# Altium PCB RGB LED.PcbDoc
Units mm, origin at the board's own origin, x right, y up, seen from the top; angles counter-clockwise.
Board outline 80 x 25 mm, 2 copper layers (Top Layer, Bottom Layer); 71 components, 81 nets, 247 pads, 87 vias.
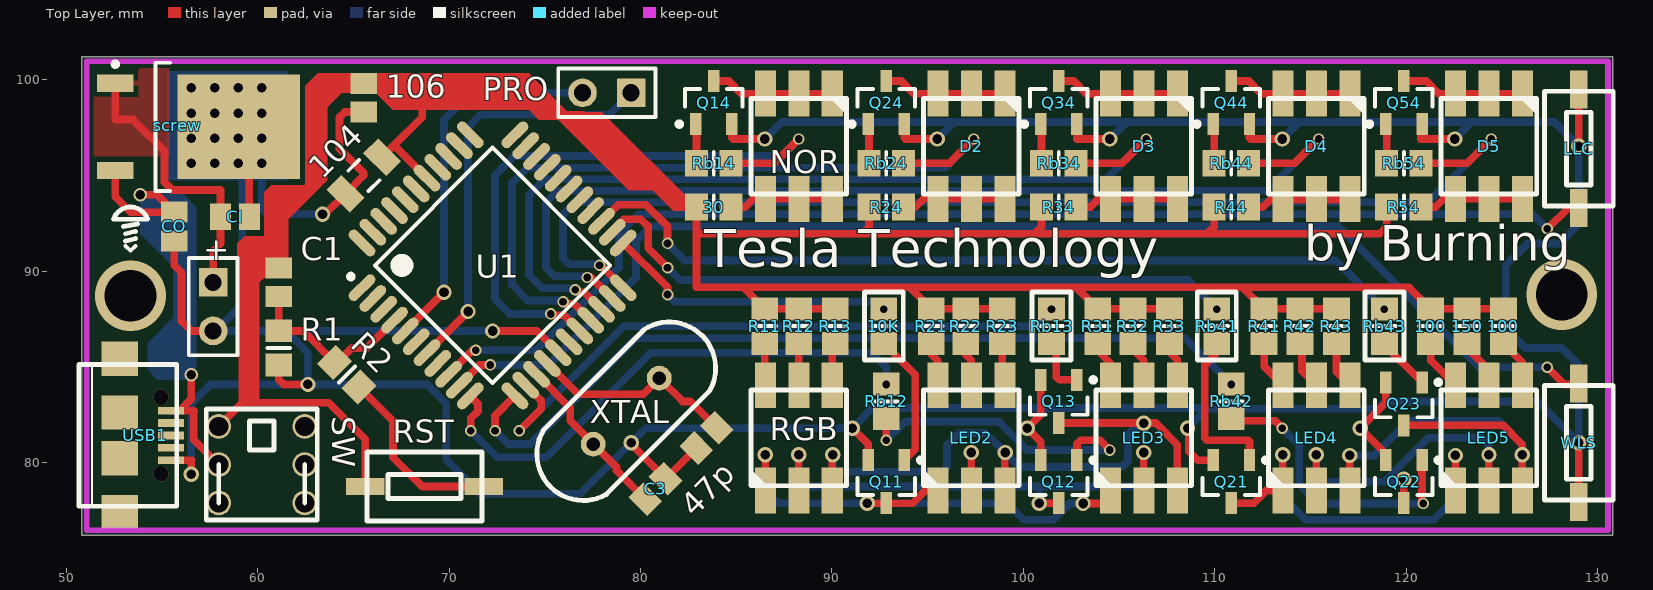
[diagram p0: Top Layer view]
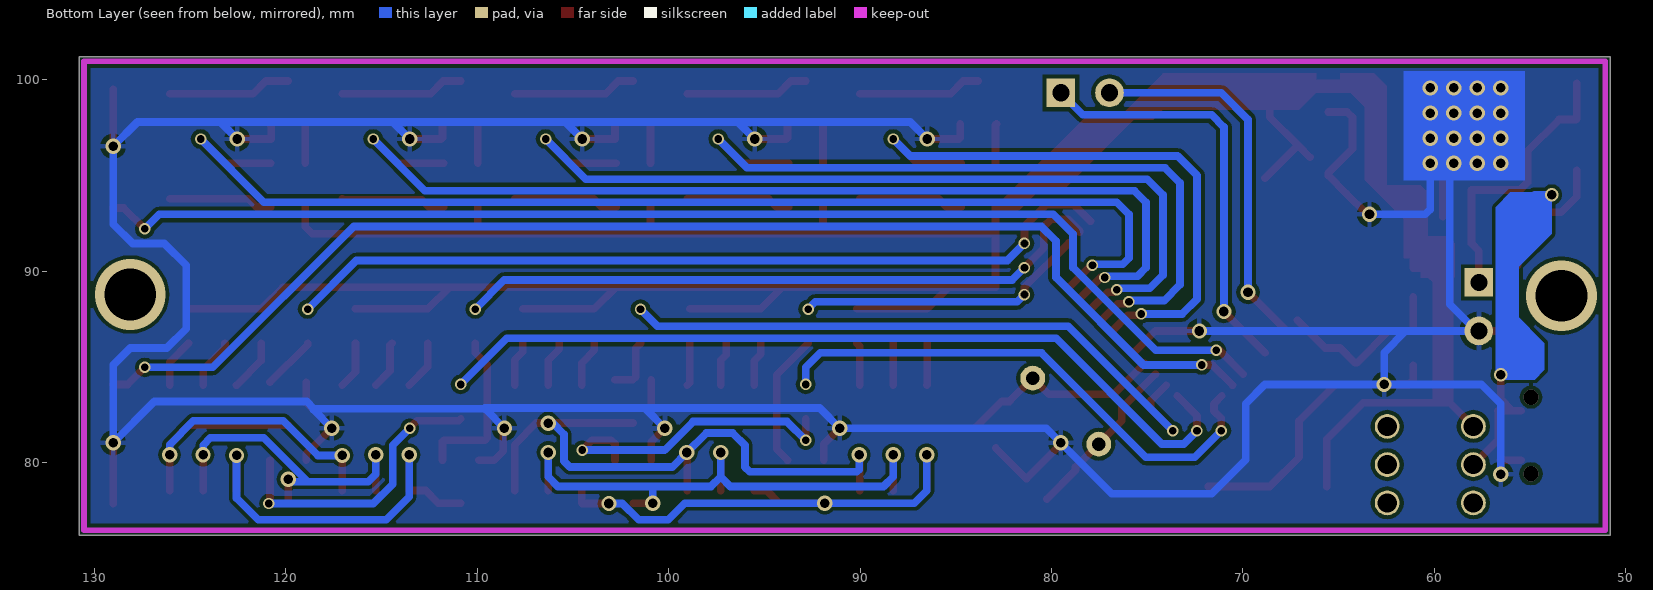
[diagram p1: Bottom Layer view, seen from below]

## Layer stack, top to bottom
Top Layer: signal copper 0.0356
Dielectric: dielectric 0.32, FR-4, Dk 4.8
Bottom Layer: signal copper 0.0356

## Board outline
50.8,76.2 130.8,76.2 130.8,101.2 50.8,101.2

## Design rules (kind name [scope] priority, off if disabled: settings)
Clearance [All] p1: gap=0.1
PolygonConnect [All] p1: connectstyle=Relief reliefconductorwidth=0.254 reliefentries=4 polygonreliefangle="90 Angle" airgapwidth=0.254
RoutingVias [All] p1: holewidth=0.6 width=1 viastyle="Through Hole" minholewidth=0.711 minwidth=1.27 maxholewidth=0.711 maxwidth=1.27
SolderMaskExpansion [All] p1: expansion=0.102
Width [All] p1: maxlimit=2 minlimit=0.1 preferedwidth=0.2
28 further rules are at their usual default settings.

## Classes and differential pairs
component class "RGB LED Beta1": C3 CI CO D2 D3 D4 D5 LED3 LED4 LED5 LLC Q11 Q12 Q13 Q14 Q21 Q22 Q23 Q24 Q34 Q44 Q54 R1 R2 R11 R12 R13 R21 R22 R23 R24 R31 R32 R33 R34 R41 R42 R43 R44 Rb12 Rb13 Rb14 Rb24 Rb34 Rb41 Rb42 Rb43 Rb44 Rb54 RST U1 WLS

## Components (designator, comment, footprint, x,y, rotation, side; value= is the part's Value field where it differs from the comment)
10K "Res2" 6-0805_N 92.71,87.122 r270 top (schematic designator Rb11)
30 "Res2" 6-0805_N 83.82,93.345 r0 top (schematic designator R14)
47p "Cap" C0805 83.439,81.28 r45 top (schematic designator C2)
100 "Res2" 6-0805_N 121.285,87.122 r270 top (schematic designator R51)
100 "Res2" 6-0805_N 125.095,87.122 r270 top (schematic designator R53)
104 "Cap" C1206 65.532,94.996 r225 top (schematic designator C5)
106 "Cap Pol1" C0805 65.532,99.06 r270 top (schematic designator C4)
150 "Res2" 6-0805_N 123.19,87.122 r270 top (schematic designator R52)
+ "Header" HDR1X2 57.658,89.408 r270 top (schematic designator POW)
C1 "Cap Pol1" C0805 61.087,89.408 r270 top
C3 "Cap" C0805 80.772,78.613 r225 top
CI "Cap Pol1" C0805 58.801,92.837 r0 top
CO "Cap Pol1" C0805 55.626,92.329 r270 top
D2 "LED0" "LED 5050 NoneRGB" 97.282,96.52 r90 top
D3 "LED0" "LED 5050 NoneRGB" 106.299,96.52 r90 top
D4 "LED0" "LED 5050 NoneRGB" 115.316,96.52 r90 top
D5 "LED0" "LED 5050 NoneRGB" 124.333,96.52 r90 top
LED2 "RGB LED" "LED 5050" 97.282,81.28 r270 top
LED3 "RGB LED" "LED 5050" 106.299,81.28 r270 top
LED4 "RGB LED" "LED 5050" 115.316,81.28 r270 top
LED5 "RGB LED" "LED 5050" 124.333,81.28 r270 top
LLC "SW-PB" SW_A 129.032,96.393 r90 top
NOR "LED0" "LED 5050 NoneRGB" 88.265,96.52 r90 top (schematic designator D1)
PRO "Header" HDR1X2 79.502,99.314 r180 top (schematic designator P2)
Q11 "s8050" SOT-23_A_N 92.837,78.994 r270 top
Q12 "s8050" SOT-23_A_N 101.854,78.994 r270 top
Q13 "s8050" SOT-23_A_N 101.854,83.185 r270 top
Q14 "s8050" SOT-23_A_N 83.82,98.806 r90 top
Q21 "s8050" SOT-23_A_N 110.871,78.994 r270 top
Q22 "s8050" SOT-23_A_N 119.888,78.994 r270 top
Q23 "s8050" SOT-23_A_N 119.888,83.058 r270 top
Q24 "s8050" SOT-23_A_N 92.837,98.806 r90 top
Q34 "s8050" SOT-23_A_N 101.854,98.806 r90 top
Q44 "s8050" SOT-23_A_N 110.871,98.806 r90 top
Q54 "s8050" SOT-23_A_N 119.888,98.806 r90 top
R1 "Res2" 6-0805_N 61.087,85.979 r270 top
R2 "Res2" 6-0805_N 64.643,84.582 r315 top
R11 "Res2" 6-0805_N 86.487,87.122 r270 top
R12 "Res2" 6-0805_N 88.265,87.122 r270 top
R13 "Res2" 6-0805_N 90.17,87.122 r270 top
R21 "Res2" 6-0805_N 95.186,87.122 r270 top
R22 "Res2" 6-0805_N 96.996,87.122 r270 top
R23 "Res2" 6-0805_N 98.901,87.122 r270 top
R24 "Res2" 6-0805_N 92.837,93.345 r0 top
R31 "Res2" 6-0805_N 103.886,87.122 r270 top
R32 "Res2" 6-0805_N 105.727,87.122 r270 top
R33 "Res2" 6-0805_N 107.632,87.122 r270 top
R34 "Res2" 6-0805_N 101.854,93.345 r0 top
R41 "Res2" 6-0805_N 112.585,87.122 r270 top
R42 "Res2" 6-0805_N 114.459,87.122 r270 top
R43 "Res2" 6-0805_N 116.364,87.122 r270 top
R44 "Res2" 6-0805_N 110.871,93.345 r0 top
R54 "Res2" 6-0805_N 119.888,93.345 r0 top
Rb12 "Res2" 6-0805_N 92.837,83.185 r270 top
Rb13 "Res2" 6-0805_N 101.473,87.122 r270 top
Rb14 "Res2" 6-0805_N 83.82,95.631 r180 top
Rb24 "Res2" 6-0805_N 92.837,95.631 r180 top
Rb34 "Res2" 6-0805_N 101.854,95.631 r180 top
Rb41 "Res2" 6-0805_N 110.109,87.122 r270 top
Rb42 "Res2" 6-0805_N 110.871,83.185 r270 top
Rb43 "Res2" 6-0805_N 118.872,87.122 r270 top
Rb44 "Res2" 6-0805_N 110.871,95.631 r180 top
Rb54 "Res2" 6-0805_N 119.888,95.631 r180 top
RGB "RGB LED" "LED 5050" 88.265,81.28 r270 top (schematic designator LED1)
RST "SW-PB" SW_A 68.707,78.74 r180 top
screw "78M05" TO_252 56.896,97.536 r0 top (schematic designator Q1)
SW "SWPB_A" SW_B 60.198,79.883 r0 top (schematic designator PS1)
U1 "89C5x/ 90C5x" TQFP44_N 72.263,90.297 r45 top
USB1 "Header 5" Micro_USB_B 56.134,81.407 r270 top
WLS "SW-PB" SW_A 129.032,81.026 r270 top
XTAL "XTAL" XTAL 79.248,82.677 r225 top (schematic designator Y1)

## Footprints (in the part's own frame and the unit in brackets; to place one, negate y for a bottom-side part, rotate by r counter-clockwise, add the part's x,y. Pads: shape width x height; smd on the part's side, far side on the other; paste and mask are expansions set on the pad)
6-0805_N [mm] "Chip Resistor, Body 2.0x1.2mm, IPC Medium Density"
  rect 1.2x1.4 smd: 1(-0.9,0) 2(0.9,0)
  silkscreen extent 0,-0.6 0,0.6, body extent -1.07,-0.7 1.07,0.7, height 0.7
C0805 [mm] "Chip Capacitor, Body 2.0x1.3mm, IPC High Density"
  rect 1.1x1.4 smd: 1(-0.75,0) 2(0.75,0)
  body extent -1.1,-0.72 1.1,0.72, height 1.4
C1206 [mm] "Chip Capacitor, Body 3.2x1.6mm, IPC High Density"
  rect 1.1x1.7 smd: 1(-1.35,0) 2(1.35,0)
  silkscreen extent -0.4,-0.75 0.4,0.75, body extent -1.7,-0.9 1.7,0.9, height 1.3
HDR1X2 [mm] "Connector; Header; 2 Position"
  rect 1.5x1.5 hole 0.9: 1(0,0)
  round 1.5 hole 0.9: 2(2.54,0)
  silkscreen extent -1.27,-1.27 3.81,1.27
"LED 5050" [mm]
  rect 2.4x1.1 smd mask+0.1: 1(-2.75,-1.75) 2(-2.75,0) 3(-2.75,1.75) 4(2.75,1.75) 5(2.75,0) 6(2.75,-1.75)
  silkscreen extent -2.5,-2.5 2.5,2.5
"LED 5050 NoneRGB" [mm]
  rect 2.4x1.1 smd mask+0.1: 1(-2.75,-1.75) 1(-2.75,0) 1(-2.75,1.75) 2(2.75,-1.75) 2(2.75,0) 2(2.75,1.75)
  silkscreen extent -2.5,-2.5 2.5,2.5
Micro_USB_B [mm] "Micro_USB_B"
  rect 1.8x1.9 smd mask+0.1: 0(-4,-3.35) 0(-1.2,-3.35) 0(1.2,-3.35) 0(4,-3.35)
  rect 0.4x1.35 smd mask+0.07: 1(-1.3,-0.675) 2(-0.65,-0.675) 3(0,-0.675) 4(0.65,-0.675) 5(1.3,-0.675)
  silkscreen extent -3.7,-5.5 3.7,-0.38
SOT-23_A_N [mm]
  rect 1.15x0.6 smd: 1(-1.125,-0.95) 2(-1.125,0.95) 3(1.125,0)
  silkscreen extent -1.25,-1.5 0.7,1.93, body extent -0.7,-1.5 0.7,1.5, height 1.1
SW_A [mm]
  rect 2x0.9 smd mask+0.1: 1(-3.1,0) 2(3.1,0)
  silkscreen extent -3,-1.8 3,1.8
SW_B [mm]
  round 1.3 hole 1 mask+0.1: 1(-2.25,2) 2(-2.25,0) 3(-2.25,-2) 4(2.25,-2) 5(2.25,0) 6(2.25,2)
  silkscreen extent -2.9,-2.9 2.9,2.9
TO_252 [mm]
  rect 1.9x0.9 smd: 1(-4.35,2.28) 3(-4.35,-2.28)
  rect 6.4x5.45 smd: 2(2.1,0)
  silkscreen extent -4.47,-3.35 -1.5,3.4, body extent -2.25,-3.35 3.97,3.35, height 2.38
TQFP44_N [mm] "Thin QFP, 44-Leads, Body 10x10mm, Pitch 0.8mm, IPC Medium Density"
  oval 1.75x0.55 smd: 1(-5.65,4) 2(-5.65,3.2) 3(-5.65,2.4) 4(-5.65,1.6) 5(-5.65,0.8) 6(-5.65,0) 7(-5.65,-0.8) 8(-5.65,-1.6) 9(-5.65,-2.4) 10(-5.65,-3.2) 11(-5.65,-4) 23(5.65,-4) 24(5.65,-3.2) 25(5.65,-2.4) 26(5.65,-1.6) 27(5.65,-0.8) 28(5.65,0) 29(5.65,0.8) 30(5.65,1.6) 31(5.65,2.4) 32(5.65,3.2) 33(5.65,4)
  oval 0.55x1.75 smd: 12(-4,-5.65) 13(-3.2,-5.65) 14(-2.4,-5.65) 15(-1.6,-5.65) 16(-0.8,-5.65) 17(0,-5.65) 18(0.8,-5.65) 19(1.6,-5.65) 20(2.4,-5.65) 21(3.2,-5.65) 22(4,-5.65) 34(4,5.65) 35(3.2,5.65) 36(2.4,5.65) 37(1.6,5.65) 38(0.8,5.65) 39(0,5.65) 40(-0.8,5.65) 41(-1.6,5.65) 42(-2.4,5.65) 43(-3.2,5.65) 44(-4,5.65)
  silkscreen extent -5.77,-4.35 4.35,4.95, body extent -5,-5 5,5, height 1.6
XTAL [mm]
  round 1.3 hole 0.7 mask+0.1: 1(-2.44,0) 2(2.44,0)
  silkscreen extent -5.6,-2.36 5.6,2.34

## Part data
10K 30 100 100 150 R1 R2 R11 R12 R13 R21 R22 R23 R24 R31 R32 R33 R34 R41 R42 R43 R44 R54 Rb12 Rb13 Rb14 Rb24 Rb34 Rb41 Rb42 Rb43 Rb44 Rb54: "Resistor"
47p 104 C3: "Capacitor"
106 C1 CI CO: "Polarized Capacitor (Radial)"
+ PRO: library part "Header 2", "Header, 2-Pin"
D2 D3 D4 D5 NOR: "Typical INFRARED GaAs LED"
LLC RST WLS: "Switch"
Q11 Q12 Q13 Q14 Q21 Q22 Q23 Q24 Q34 Q44 Q54: library part 2N3904, "NPN General Purpose Amplifier"
screw: library part 78XX
SW: library part SW-SPST, "Single-Pole, Single-Throw Switch"
USB1: "Header, 5-Pin"
XTAL: "Crystal Oscillator"

## Via types
v1: diameter 0.8, hole 0.5, Top Layer to Bottom Layer, 51 vias
v2: diameter 0.6, hole 0.4, Top Layer to Bottom Layer, 30 vias
v3: diameter 0.7, hole 0.5, Top Layer to Bottom Layer, 2 vias
v4: diameter 0.8, hole 0.8, Top Layer to Bottom Layer, 2 vias
v5: diameter 3.7, hole 2.7, Top Layer to Bottom Layer, 2 vias

## Nets (pads, with @x,y where several pads share a name; then routed paths per layer and width w, separated by ;. In a path a pad name is that pad's centre, name@x,y a point inside that pad or via, vN(x,y) a via of type N, cw(c..) or ccw(c..) an arc to the next point about the centre after c; other vN are vias at no path point)
GND: 47p.1 104.2 106.2 +.2 C3.1 CI.2 CO.2 LLC.2 Q11.1 Q12.1 Q13.1 Q14.1 Q21.1 Q22.1 Q23.1 Q24.1 Q34.1 Q44.1 Q54.1 R1.2 screw.2 U1.16 USB1.5 WLS.2 | length 255.5
  Top Layer w0.4: USB1.5 56.545,80.107 56.515,80.077 v1(56.515,79.375) ; CO.2 55.626,90.297 56.007,89.916 56.007,87.376 56.515,86.868 +.2 ; screw.2 59.551,96.981 CI.2 ; R1.2 61.087,84.328 61.341,84.074 v1(62.611,84.074) ; v1(63.373,92.964) 63.5,92.964 104.2 65.532,94.996 65.532,95.123 64.262,96.393 64.262,98.044 64.528,98.31 106.2 ; v1(72.263,86.868) 74.561,86.868 U1.16 ; v1(79.502,81.026) 79.502,80.944 C3.1 47p.1 ; Q14.1 84.77,96.967 84.836,96.901 v1(86.487,96.901) ; v1(91.059,81.788) 91.887,80.96 Q11.1 ; Q24.1 93.787,96.967 93.853,96.901 v1(95.504,96.901) ; Q12.1 100.904,81.087 v1(100.203,81.788) 100.904,82.489 Q13.1 ; Q34.1 102.804,96.901 v1(104.521,96.901) ; v1(108.585,81.788) 108.649,81.724 108.649,80.581 109.111,80.119 Q21.1 ; Q44.1 111.821,96.967 111.887,96.901 v1(113.538,96.901) ; Q22.1 118.938,80.452 v1(117.602,81.788) 118.938,83.124 Q23.1 ; Q54.1 120.777,97.62 120.777,96.901 v1(122.555,96.901) ; WLS.2@129.032,77.851 v1(129.032,81.026) ; v1(129.032,96.52) LLC.2
  Bottom Layer w0.4: v1(56.515,79.375) 56.515,83.058 57.531,84.074 v1(62.611,84.074) ; +.2 +.2@57.785,86.868 ; v1(58.97,95.631) 59.182,95.419 59.182,88.265 +.2@57.785,86.868 ; v1(60.198,95.631) 60.198,93.218 60.452,92.964 v1(63.373,92.964) ; v1(72.263,86.868) 61.468,86.868 ; v1(86.487,96.901) 87.376,97.79 96.393,97.79 ; v1(95.504,96.901) 96.393,97.79 ; v1(100.203,81.788) 101.257,82.842 ; v1(104.521,96.901) 105.41,97.79 ; v1(108.585,81.788) 109.563,82.766 ; v1(113.538,96.901) 114.427,97.79 ; v1(117.602,81.788) 118.58,82.766 118.542,82.804 ; v1(122.555,96.901) 123.444,97.79 ; +.2@57.785,86.868 61.468,86.868 ; 61.468,86.868 62.611,85.725 v1(62.611,84.074) ; v1(62.611,84.074) 68.834,84.074 69.85,83.058 69.85,80.137 71.628,78.359 76.835,78.359 v1(79.502,81.026) 80.264,81.788 v1(91.059,81.788) 92.113,82.842 101.257,82.842 ; 96.393,97.79 105.41,97.79 ; 101.257,82.842 109.601,82.842 109.601,82.804 118.542,82.804 ; 105.41,97.79 114.427,97.79 ; 114.427,97.79 123.444,97.79 ; 118.542,82.804 118.923,83.185 126.873,83.185 v1(129.032,81.026) 129.032,85.09 128.143,85.979 126.238,85.979 125.222,86.995 125.222,90.297 126.365,91.44 128.016,91.44 129.032,92.456 v1(129.032,96.52) 127.762,97.79 123.444,97.79
  other v1: 56.515,95.631 57.743,95.631 56.515,96.943 57.743,96.943 58.97,96.943 60.198,96.943 56.515,98.256 57.743,98.256 58.97,98.256 60.198,98.256 56.515,99.568 57.743,99.568 58.97,99.568 60.198,99.568
INPUT: CO.1 screw.3 SW.2 USB1.1 | length 24.6
  Top Layer w0.4: screw.3 52.546,93.885 53.352,93.079 CO.1 54.725,93.98 v3(53.848,93.98) ; USB1.1 USB1.1@55.91,82.707 ; v3(56.515,84.582) 56.515,83.312 USB1.1@55.91,82.707 ; 56.637,82.682 56.612,82.707 USB1.1@55.91,82.707 ; 56.642,82.677 56.642,81.189 SW.2
  Top Layer w0.45: 56.637,82.682 56.642,82.677
  Bottom Layer w0.4: v3(53.848,93.98) 54.737,93.98 55.753,92.964 55.753,86.487 56.515,85.725 v3(56.515,84.582)
NetCI_1: +.1 CI.1 screw.1 | length 14.8
  Top Layer w0.4: screw.1 52.546,97.949 52.578,97.917 53.467,97.917 55.118,96.266 55.118,94.627 55.511,94.234 58.039,94.234 58.039,91.44 57.658,91.059 +.1
NetD1_1: 30.2 NOR.1 | length 5.5
  Top Layer w0.4: 30.2 85.471,93.345 85.896,93.77 86.515,93.77 88.265,93.77 NOR.1@90.015,93.77
NetD1_2: NOR.2 Q14.3 | length 6.5
  Top Layer w0.4: Q14.3 84.6,99.931 85.261,99.27 86.515,99.27 88.265,99.27 NOR.2@90.015,99.27
NetD2_1: D2.1 R24.2 | length 5.5
  Top Layer w0.4: R24.2 94.361,93.345 94.786,93.77 95.532,93.77 97.282,93.77 D2.1@99.032,93.77
NetD2_2: D2.2 Q24.3 | length 6.5
  Top Layer w0.4: Q24.3 93.617,99.931 94.278,99.27 D2.2@99.032,99.27
NetD3_1: D3.1 R34.2 | length 5.5
  Top Layer w0.4: R34.2 103.505,93.345 103.93,93.77 104.549,93.77 106.299,93.77 D3.1@108.049,93.77
NetD3_2: D3.2 Q34.3 | length 6.5
  Top Layer w0.4: Q34.3 102.634,99.931 103.295,99.27 104.549,99.27 106.299,99.27 D3.2@108.049,99.27
NetD4_1: D4.1 R44.2 | length 5.5
  Top Layer w0.4: R44.2 112.522,93.345 112.903,93.726 117.022,93.726 D4.1@117.066,93.77
NetD4_2: D4.2 Q44.3 | length 6.5
  Top Layer w0.4: Q44.3 111.778,99.931 112.439,99.27 113.566,99.27 115.316,99.27 D4.2@117.066,99.27
NetD5_1: D5.1 R54.2 | length 5.5
  Top Layer w0.4: R54.2 121.539,93.345 121.964,93.77 122.583,93.77 124.333,93.77 D5.1@126.083,93.77
NetD5_2: D5.2 Q54.3 | length 6.5
  Top Layer w0.4: Q54.3 121.049,99.931 121.71,99.27 122.583,99.27 124.333,99.27 D5.2@126.083,99.27
NetLED1_1: R11.2 RGB.1 | length 2.2
  Top Layer w0.4: R11.2 86.487,84.058 RGB.1
NetLED1_2: R12.2 RGB.2 | length 2.2
  Top Layer w0.4: RGB.2 R12.2
NetLED1_3: R13.2 RGB.3 | length 2.3
  Top Layer w0.4: RGB.3 90.015,86.067 R13.2
NetLED1_4: LED2.4 LED3.4 Q13.3 RGB.4 | length 34
  Top Layer w0.4: RGB.4 90.015,80.363 v1(90.043,80.391) ; LED2.4 99.032,80.49 v1(99.06,80.518) ; Q13.3 106.916,82.06 108.049,80.927 LED3.4
  Bottom Layer w0.4: v1(90.043,80.391) 90.043,79.629 90.17,79.502 95.758,79.502 96.012,79.756 96.012,80.899 96.647,81.534 98.044,81.534 v1(99.06,80.518) 99.822,79.756 105.156,79.756 105.474,80.073 105.474,81.471 106.045,82.042 v1(106.299,82.042)
NetLED1_5: LED2.5 LED3.5 Q12.3 RGB.5 | length 30.3
  Top Layer w0.4: RGB.5 v1(88.265,80.391) ; LED2.5 v1(97.282,80.518) ; v1(100.838,77.869) Q12.3 ; LED3.5 v1(106.299,80.518)
  Bottom Layer w0.4: v1(88.265,80.391) 88.265,79.248 88.773,78.74 96.774,78.74 97.282,79.248 ; v1(97.282,80.518) 97.282,79.248 ; v1(100.838,77.869) 100.838,78.74 ; v1(106.299,80.518) 106.299,79.248 105.791,78.74 100.838,78.74 ; 97.282,79.248 97.79,78.74 100.838,78.74
NetLED1_6: LED2.6 LED3.6 Q11.3 RGB.6 | length 27.4
  Top Layer w0.4: RGB.6 v1(86.515,80.391) ; v1(91.839,77.869) Q11.3 94.216,77.869 94.877,78.53 LED2.6 ; v1(103.124,77.851) 104.521,77.851 104.549,77.879 LED3.6
  Bottom Layer w0.4: v1(86.515,80.391) 86.515,78.514 87.16,77.869 v1(91.839,77.869) 99.169,77.869 100.034,77.004 101.573,77.004 102.42,77.851 v1(103.124,77.851)
NetLED2_1: LED2.1 R21.2 | length 2.3
  Top Layer w0.4: R21.2 95.187,85.661 95.532,85.316 LED2.1
NetLED2_2: LED2.2 R22.2 | length 2.3
  Top Layer w0.4: R22.2 96.996,85.63 97.282,85.344 LED2.2
NetLED2_3: LED2.3 R23.2 | length 2.2
  Top Layer w0.4: R23.2 98.901,84.161 LED2.3
NetLED3_1: LED3.1 R31.2 | length 2.5
  Top Layer w0.4: R31.2 103.886,85.852 104.549,85.189 LED3.1
NetLED3_2: LED3.2 R32.2 | length 2.4
  Top Layer w0.4: R32.2 105.728,85.915 106.299,85.344 LED3.2
NetLED3_3: LED3.3 R33.2 | length 2.4
  Top Layer w0.4: R33.2 107.633,85.788 108.049,85.372 LED3.3
NetLED4_1: LED4.1 R41.2 | length 2.6
  Top Layer w0.4: R41.2 112.586,85.01 LED4.1
NetLED4_2: LED4.2 R42.2 | length 2.5
  Top Layer w0.4: R42.2 114.566,86.115 114.566,84.78 LED4.2
NetLED4_3: LED4.3 R43.2 | length 2.5
  Top Layer w0.4: R43.2 116.364,84.732 LED4.3
NetLED4_4: LED4.4 LED5.4 Q23.3 | length 21.7
  Top Layer w0.4: LED4.4 v1(117.066,80.363) ; Q23.3 125.077,81.933 126.083,80.927 v1(126.083,80.391) LED5.4
  Bottom Layer w0.4: v1(117.066,80.363) 118.336,80.363 120.142,82.169 124.841,82.169 126.083,80.927 v1(126.083,80.391)
NetLED4_5: LED4.5 LED5.5 Q22.3 | length 17.8
  Top Layer w0.4: LED4.5 v1(115.316,80.391) ; Q22.3 v1(119.888,79.121) ; LED5.5 v1(124.333,80.391)
  Bottom Layer w0.4: v1(115.316,80.391) 115.316,79.375 115.697,78.994 118.872,78.994 ; v1(119.888,79.121) 119.761,78.994 118.872,78.994 ; v1(124.333,80.391) 124.333,80.899 123.952,81.28 121.158,81.28 118.872,78.994
NetLED4_6: LED4.6 LED5.6 Q21.3 | length 21.1
  Top Layer w0.4: Q21.3 112.032,77.869 112.693,78.53 LED4.6 v1(113.566,80.391) ; LED5.6 v1(122.583,80.363)
  Bottom Layer w0.4: v1(113.566,80.391) 113.566,78.204 114.766,77.004 121.454,77.004 122.583,78.133 v1(122.583,80.363)
NetLED5_1: 100.2@121.285,86.222 LED5.1 | length 2.7
  Top Layer w0.4: 100.2@121.285,86.222 121.285,85.328 LED5.1
NetLED5_2: 150.2 LED5.2 | length 2.7
  Top Layer w0.4: 150.2 123.19,85.979 124.333,84.836 LED5.2
NetLED5_3: 100.2@125.095,86.222 LED5.3 | length 2.6
  Top Layer w0.4: 100.2@125.095,86.222 126.083,85.234 LED5.3
NetQ11_2: 10K.2 Q11.2 | length 7
  Top Layer w0.4: 10K.2 94.35,84.582 94.35,80.682 Q11.2
NetQ12_2: Q12.2 Rb12.2 | length 16.7
  Top Layer w0.4: v2(92.837,81.153) Rb12.2 ; Q12.2 102.804,80.96 102.997,81.153 104.013,81.153 v2(104.521,80.645)
  Bottom Layer w0.4: v2(92.837,81.153) 93.818,82.134 98.726,82.134 100.215,80.645 v2(104.521,80.645)
NetQ13_2: Q13.2 Rb13.2 | length 3
  Top Layer w0.4: Rb13.2 101.727,85.968 101.727,84.455 101.872,84.31 Q13.2
NetQ14_2: Q14.2 Rb14.2 | length 2.1
  Top Layer w0.4: Q14.2 82.92,97.631 Rb14.2
NetQ21_2: Q21.2 Rb41.2 | length 8.6
  Top Layer w0.4: Rb41.2 110.109,85.725 109.474,85.09 109.474,81.28 109.601,81.153 111.76,81.153 111.821,81.092 Q21.2
NetQ22_2: Q22.2 Rb42.2 | length 15.4
  Top Layer w0.4: Rb42.2 110.987,82.169 113.157,82.169 v2(113.538,81.788) ; Q22.2 120.838,77.917 v2(120.904,77.851)
  Bottom Layer w0.4: v2(113.538,81.788) 114.427,80.899 114.427,78.867 115.443,77.851 v2(120.904,77.851)
NetQ23_2: Q23.2 Rb43.2 | length 2.9
  Top Layer w0.4: Rb43.2 118.872,86.149 Q23.2
NetQ24_2: Q24.2 Rb24.2 | length 2.1
  Top Layer w0.4: Q24.2 91.937,97.631 Rb24.2
NetQ34_2: Q34.2 Rb34.2 | length 2.1
  Top Layer w0.4: Q34.2 100.954,97.631 Rb34.2
NetQ44_2: Q44.2 Rb44.2 | length 2.1
  Top Layer w0.4: Q44.2 109.971,97.631 Rb44.2
NetQ54_2: Q54.2 Rb54.2 | length 2.1
  Top Layer w0.4: Q54.2 118.988,97.631 Rb54.2
NetR2_2: R2.2 RST.1 | length 9.8
  Top Layer w0.4: R2.2 67.056,82.169 67.056,80.264 68.58,78.74 RST.1
P0.0: U1.37
P0.1: U1.36
P0.2: U1.35
P0.3: U1.34
P0.4: U1.33
P0.5: U1.32
P0.6: U1.31
P0.7: U1.30
P1.0: U1.40
P1.1: U1.41
P1.2: U1.42
P1.3: U1.43
P1.4: U1.44
P1.5: U1.1
P1.6: U1.2
P1.7: U1.3
P2.0: Rb14.1 U1.18 | length 32.3
  Top Layer w0.4: v2(75.311,87.757) 75.376,87.692 75.999,87.692 U1.18 ; Rb14.1 86.995,95.631 v2(88.265,96.901)
  Bottom Layer w0.4: v2(75.311,87.757) 73.152,87.757 72.39,88.519 72.39,94.996 73.406,96.012 87.376,96.012 v2(88.265,96.901)
P2.1: Rb24.1 U1.19 | length 39.5
  Top Layer w0.4: v2(75.946,88.392) 76.046,88.292 76.531,88.292 U1.19 ; Rb24.1 96.139,95.631 v2(97.409,96.901)
  Bottom Layer w0.4: v2(75.946,88.392) 75.881,88.457 74.103,88.457 73.279,89.281 73.279,94.615 74.063,95.399 95.907,95.399 v2(97.409,96.901)
P2.2: Rb34.1 U1.20 | length 46.4
  Top Layer w0.4: v2(76.581,89.027) 76.716,88.892 77.062,88.892 U1.20 ; Rb34.1 105.156,95.631 v2(106.426,96.901)
  Bottom Layer w0.4: v2(76.581,89.027) 76.516,89.092 74.865,89.092 74.168,89.789 74.168,93.98 74.987,94.799 104.324,94.799 v2(106.426,96.901)
P2.3: Rb44.1 U1.21 | length 53.5
  Top Layer w0.4: v2(77.216,89.662) 77.423,89.662 U1.21 ; Rb44.1 114.173,95.631 v2(115.443,96.901)
  Bottom Layer w0.4: v2(77.216,89.662) 77.151,89.727 75.5,89.727 75.057,90.17 75.057,93.599 75.657,94.199 112.741,94.199 v2(115.443,96.901)
P2.4: Rb54.1 U1.22 | length 60.4
  Top Layer w0.4: v2(77.851,90.297) 77.92,90.297 U1.22 ; Rb54.1 123.19,95.631 v2(124.46,96.901)
  Bottom Layer w0.4: v2(77.851,90.297) 77.786,90.362 76.262,90.362 75.946,90.678 75.946,92.964 76.581,93.599 121.158,93.599 v2(124.46,96.901)
P2.5: 10K.1 U1.23 | length 15.3
  Top Layer w0.4: U1.23 81.407,89.143 v2(81.407,88.773)
  Bottom Layer w0.4: v2(81.407,88.773) 81.788,88.392 92.329,88.392 v2(92.71,88.011)
P2.6: Rb41.1 U1.24 | length 34.5
  Top Layer w0.4: U1.24 78.521,92.11 79.121,92.71 80.01,92.71 80.391,92.329 80.391,91.186 v2(81.407,90.17)
  Bottom Layer w0.4: v2(81.407,90.17) 82.042,89.535 108.585,89.535 v2(110.109,88.011)
P2.7: Rb43.1 U1.25 | length 44.1
  Top Layer w0.4: U1.25 78.832,93.472 80.264,93.472 81.407,92.329 v2(81.407,91.44)
  Bottom Layer w0.4: v2(81.407,91.44) 82.296,90.551 116.332,90.551 v2(118.872,88.011)
P3.3: LLC.1 U1.9 | length 64.3
  Top Layer w0.4: U1.9 71.212,85.852 v2(71.374,85.852) ; v2(127.381,92.202) 128.472,93.293 LLC.1
  Bottom Layer w0.4: v2(71.374,85.852) 74.549,85.852 78.867,90.17 78.867,91.933 79.898,92.964 126.619,92.964 v2(127.381,92.202)
P3.4: U1.10 WLS.1 | length 66.5
  Top Layer w0.4: U1.10 71.581,85.09 v2(72.136,85.09) ; v2(127.381,84.963) 128.27,84.074 WLS.1@129.032,84.074
  Bottom Layer w0.4: v2(72.136,85.09) 75.184,85.09 79.756,89.662 79.756,91.567 80.518,92.329 116.459,92.329 123.825,84.963 v2(127.381,84.963)
P3.5: Rb12.1 U1.11 | length 27.9
  Top Layer w0.4: U1.11 71.501,83.069 71.501,82.677 71.12,82.296 v2(71.12,81.661)
  Bottom Layer w0.4: v2(71.12,81.661) 72.517,80.264 75.057,80.264 80.518,85.725 92.075,85.725 92.837,84.963 v2(92.837,84.074)
P3.6: Rb42.1 U1.12 | length 44.3
  Top Layer w0.4: v2(72.39,81.661) 72.39,82.434 U1.12
  Bottom Layer w0.4: v2(72.39,81.661) 73.09,80.961 74.23,80.961 79.756,86.487 108.458,86.487 v2(110.871,84.074)
P3.7: Rb13.1 U1.13 | length 33.6
  Top Layer w0.4: v2(73.66,81.661) 74.803,82.804 74.803,83.232 U1.13
  Bottom Layer w0.4: v2(73.66,81.661) 79.121,87.122 100.584,87.122 v2(101.473,88.011)
RST: C1.2 R1.1 R2.1 U1.4 | length 9.4
  Top Layer w0.4: C1.2 R1.1 61.098,86.868 62.357,86.868 R2.1 64.136,85.218 64.897,85.979 65.682,85.979 U1.4
RXD: PRO.2 U1.5 | length 19.7
  Top Layer w0.4: U1.5 v1(69.723,88.888) v1@69.723,88.9
  Bottom Layer w0.4: v1(69.723,88.888) 69.723,97.917 71.12,99.314 PRO.2
TXD: PRO.1 U1.7 | length 22
  Top Layer w0.4: U1.7 v1(70.981,87.884) v1@70.993,87.884
  Bottom Layer w0.4: v1(70.981,87.884) 70.981,97.524 71.621,98.164 78.352,98.164 PRO.1
VCC: 30.1 100.1 104.1 106.1 150.1 C1.1 R11.1 R12.1 R13.1 R21.1 R22.1 R23.1 R24.1 R31.1 R32.1 R33.1 R34.1 R41.1 R42.1 R43.1 R44.1 R54.1 RST.2 SW.1 U1.38 | length 169.9
  Top Layer w0.4: SW.1 59.182,83.117 ; RST.2 65.607,81.205 63.695,83.117 59.182,83.117 ; 104.1 67.044,96.508 ; U1.38 67.183,96.508 67.044,96.508 ; R13.1 R12.1 R11.1 85.355,89.154 ; R24.1 91.937,92.318 91.567,91.948 ; R23.1 R22.1 R21.1 94.055,89.154 ; R34.1 100.954,92.318 100.584,91.948 ; R33.1 R32.1 R31.1 102.754,89.154 ; R44.1 109.971,92.318 109.601,91.948 ; R43.1 R42.1 R41.1 111.454,89.154 ; R54.1 118.988,92.318 118.618,91.948 109.601,91.948 ; 100.1@125.095,88.022 150.1 121.285,88.022 120.153,89.154 111.454,89.154 ; 59.182,83.117 59.182,89.662 59.678,90.158 C1.1 61.087,92.837 63.373,95.123 63.373,99.314 63.869,99.81 106.1 68.58,99.81 ; 67.044,96.508 68.58,98.044 68.58,99.81 ; 68.58,99.81 74.053,99.81 75.699,98.164 76.969,98.164 81.788,93.345 30.1 82.92,91.948 ; 82.92,91.948 82.92,89.154 85.355,89.154 ; 82.92,91.948 91.567,91.948 ; 85.355,89.154 94.055,89.154 ; 91.567,91.948 100.584,91.948 ; 94.055,89.154 102.754,89.154 ; 100.584,91.948 109.601,91.948 ; 102.754,89.154 111.454,89.154
XTAL1: 47p.2 U1.15 XTAL.1 | length 10.9
  Top Layer w0.4: U1.15 76.731,83.566 80.137,83.566 XTAL.1 82.191,83.185 82.595,83.185 47p.2
XTAL2: C3.2 U1.14 XTAL.2 | length 8.9
  Top Layer w0.4: U1.14 76.327,82.839 76.327,82.169 78.74,79.756 78.74,79.584 C3.2
pads on no net: SW.3 SW.4 SW.5 SW.6 U1.6 U1.8 U1.17 U1.26 U1.27 U1.28 U1.29 U1.39 USB1.0 USB1.2 USB1.3 USB1.4
copper on no net:
  other v4: 54.934,79.407 54.934,83.407
  other v5: 53.34,88.709 128.143,88.773

## Polygon pours and split planes (outlines as drawn)
NetCI_1 on Top Layer "Top Layer-No Net" (solid, pour order 6): 51.181,100.838 55.372,100.838 55.372,96.012 51.181,96.012
GND on Bottom Layer "Top Layer-No Net" (solid, pour order 19): 51.054,100.965 51.054,76.454 130.556,76.454 130.556,100.965

## Keep-outs
Keep-Out Layer:
  lines w0.3: 51.054,76.454 130.556,76.454 130.556,100.965 51.054,100.965 51.054,76.454

## Other copper
Top Layer:
  region net VCC: 62.738,93.853 61.595,92.71 61.595,90.678 61.214,90.678 61.214,92.964 61.976,93.726 61.976,93.853
  region net VCC: 60.325,93.091 60.325,94.107 60.706,94.488 61.722,94.488
  region net VCC: 66.167,99.314 64.389,99.314 63.5,98.425 63.5,99.441 63.869,99.81 66.167,99.81
  region net VCC: 61.722,93.853 62.738,93.853 63.627,94.742 63.627,99.822 63.246,99.441 63.246,95.25
  region net VCC: 62.484,94.361 62.484,99.695 63.119,100.33 64.897,100.33 64.897,99.81 63.869,99.81 63.373,99.314 63.373,95.123
  region net VCC: 58.928,89.662 58.928,91.44 59.309,91.821 60.325,91.821 60.325,93.091 61.722,94.488 62.738,94.488 61.087,92.837 61.087,90.158 59.448,90.158 59.436,90.17
  region net VCC: 60.706,90.158 59.678,90.158 59.182,89.662 59.182,83.117 59.944,83.117 60.071,83.244 60.071,89.408 60.325,89.662 60.706,89.662
  region net VCC: 76.327,98.164 74.168,100.323 74.168,100.33 73.787,100.33 75.819,98.298 75.819,98.164
  region net VCC: 74.041,98.552 74.676,97.917 75.946,97.917 75.311,98.552
  region net VCC: 75.692,98.425 67.056,98.425 66.167,99.314 66.167,100.33 73.787,100.33
  region net VCC: 82.92,93.345 82.92,93.356 77.978,98.298 76.835,98.298 81.788,93.345
  region net VCC: 75.445,98.164 79.375,94.234 80.899,94.234 76.969,98.164
Bottom Layer:
  rectangle net GND: 55.245,94.742 61.595,100.457
  region net INPUT: 54.864,94.107 56.007,94.107 56.769,93.345 56.769,84.582 56.515,84.328 55.753,85.09 55.753,93.218
  region net INPUT: 53.848,93.98 53.848,91.948 55.753,90.043 55.753,92.964 54.737,93.98
  region net INPUT: 55.753,87.757 54.229,86.233 54.229,84.836 54.737,84.328 56.515,84.328 56.515,85.725 55.753,86.487

## Silkscreen, mask and mechanical layers (free items; w line width, h text height)
Top Overlay:
  lines w0.2: 53.086,91.313 53.34,91.059 53.594,91.313
  lines w0.254: 52.959,92.329 53.721,92.456 ; 53.086,91.567 53.594,91.694 ; 53.086,91.948 53.594,92.075 ; 52.451,92.71 cw(c53.34,92.405) 54.229,92.71 52.451,92.71 ; 91.694,85.344 91.694,88.9 93.726,88.9 93.726,85.344 91.694,85.344 ; 100.457,85.344 100.457,88.9 102.489,88.9 102.489,85.344 100.457,85.344 ; 109.093,85.344 109.093,88.9 111.125,88.9 111.125,85.344 109.093,85.344 ; 117.856,85.344 117.856,88.9 119.888,88.9 119.888,85.344 117.856,85.344
  text "by Burning" at 114.681,89.916 h3.2
  text "Tesla Technology" at 83.312,89.535 h3.4